# Altium PCB PCI Express x1 - 111.15x167.65mm.pcbdoc
Units mm, origin at the board's own origin, x right, y up, seen from the top; angles counter-clockwise.
Board outline 167.65 x 111.15 mm, 4 copper layers (Top Layer, InternalPlane1, InternalPlane2, Bottom Layer), stack 1.59 mm thick; 1 components, 0 nets, 38 pads, 0 vias.
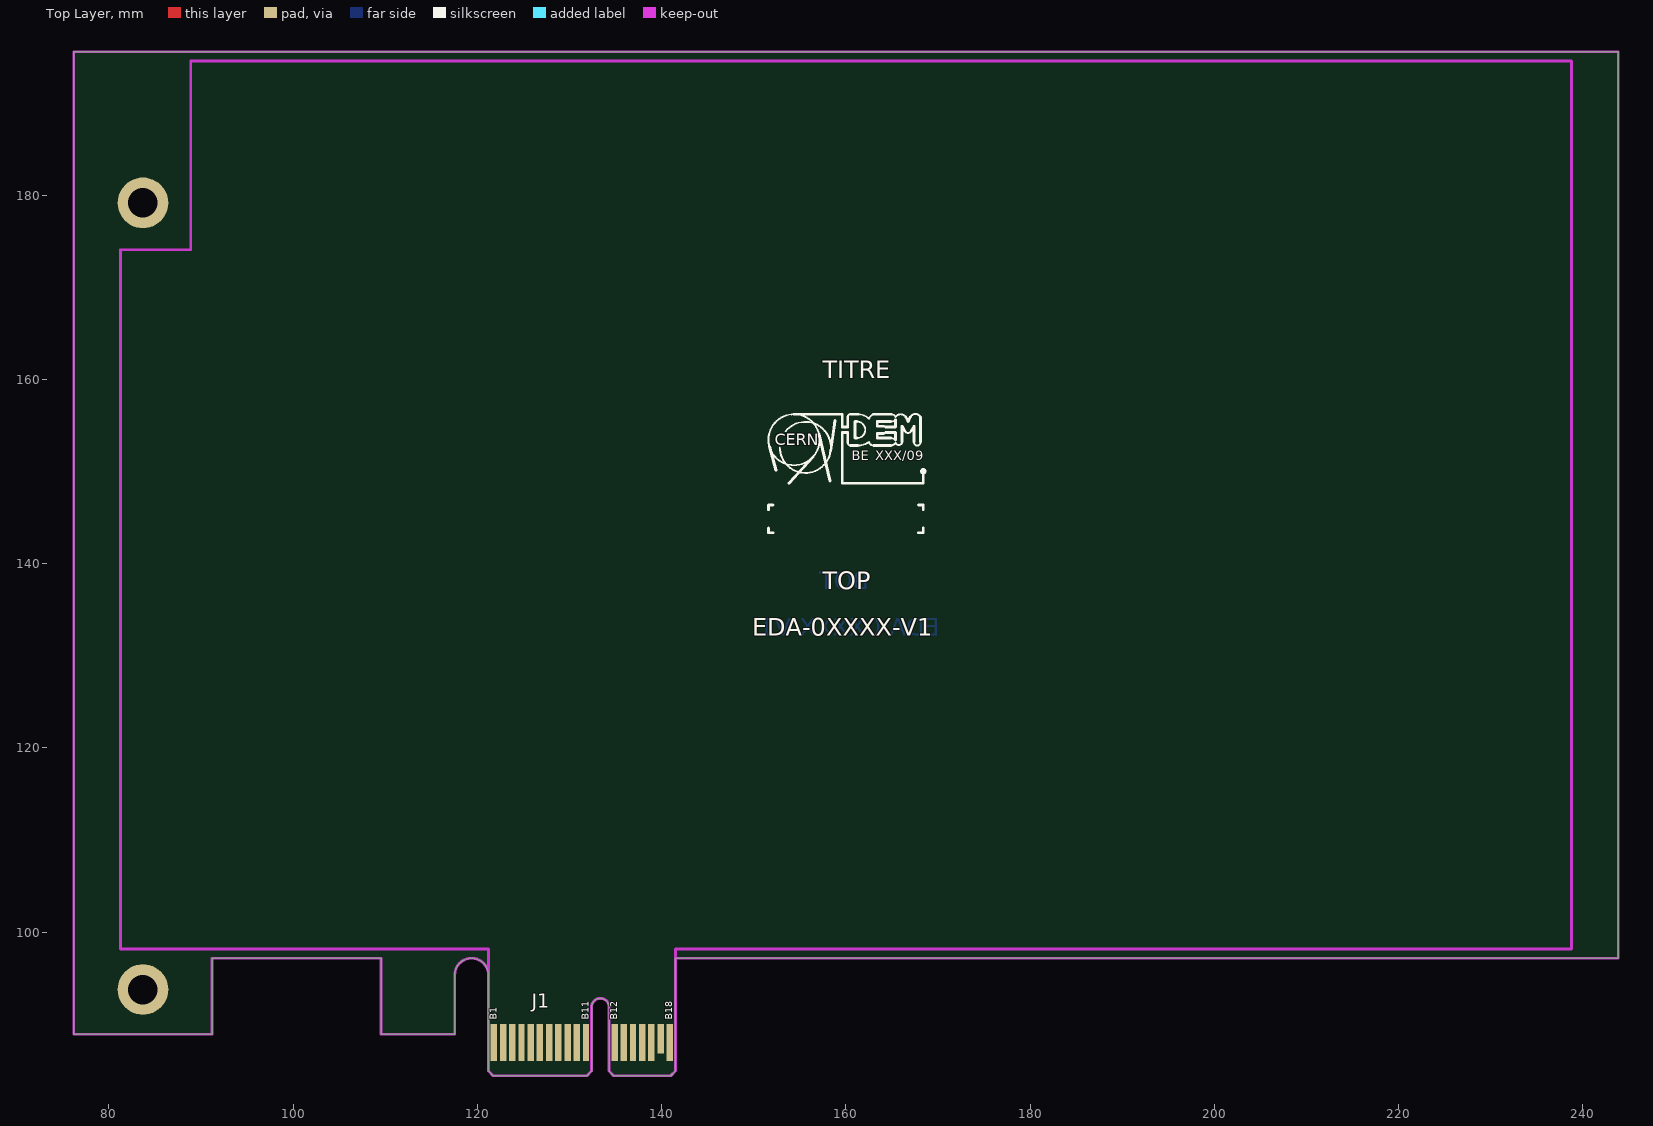
[diagram p0: Top Layer view]
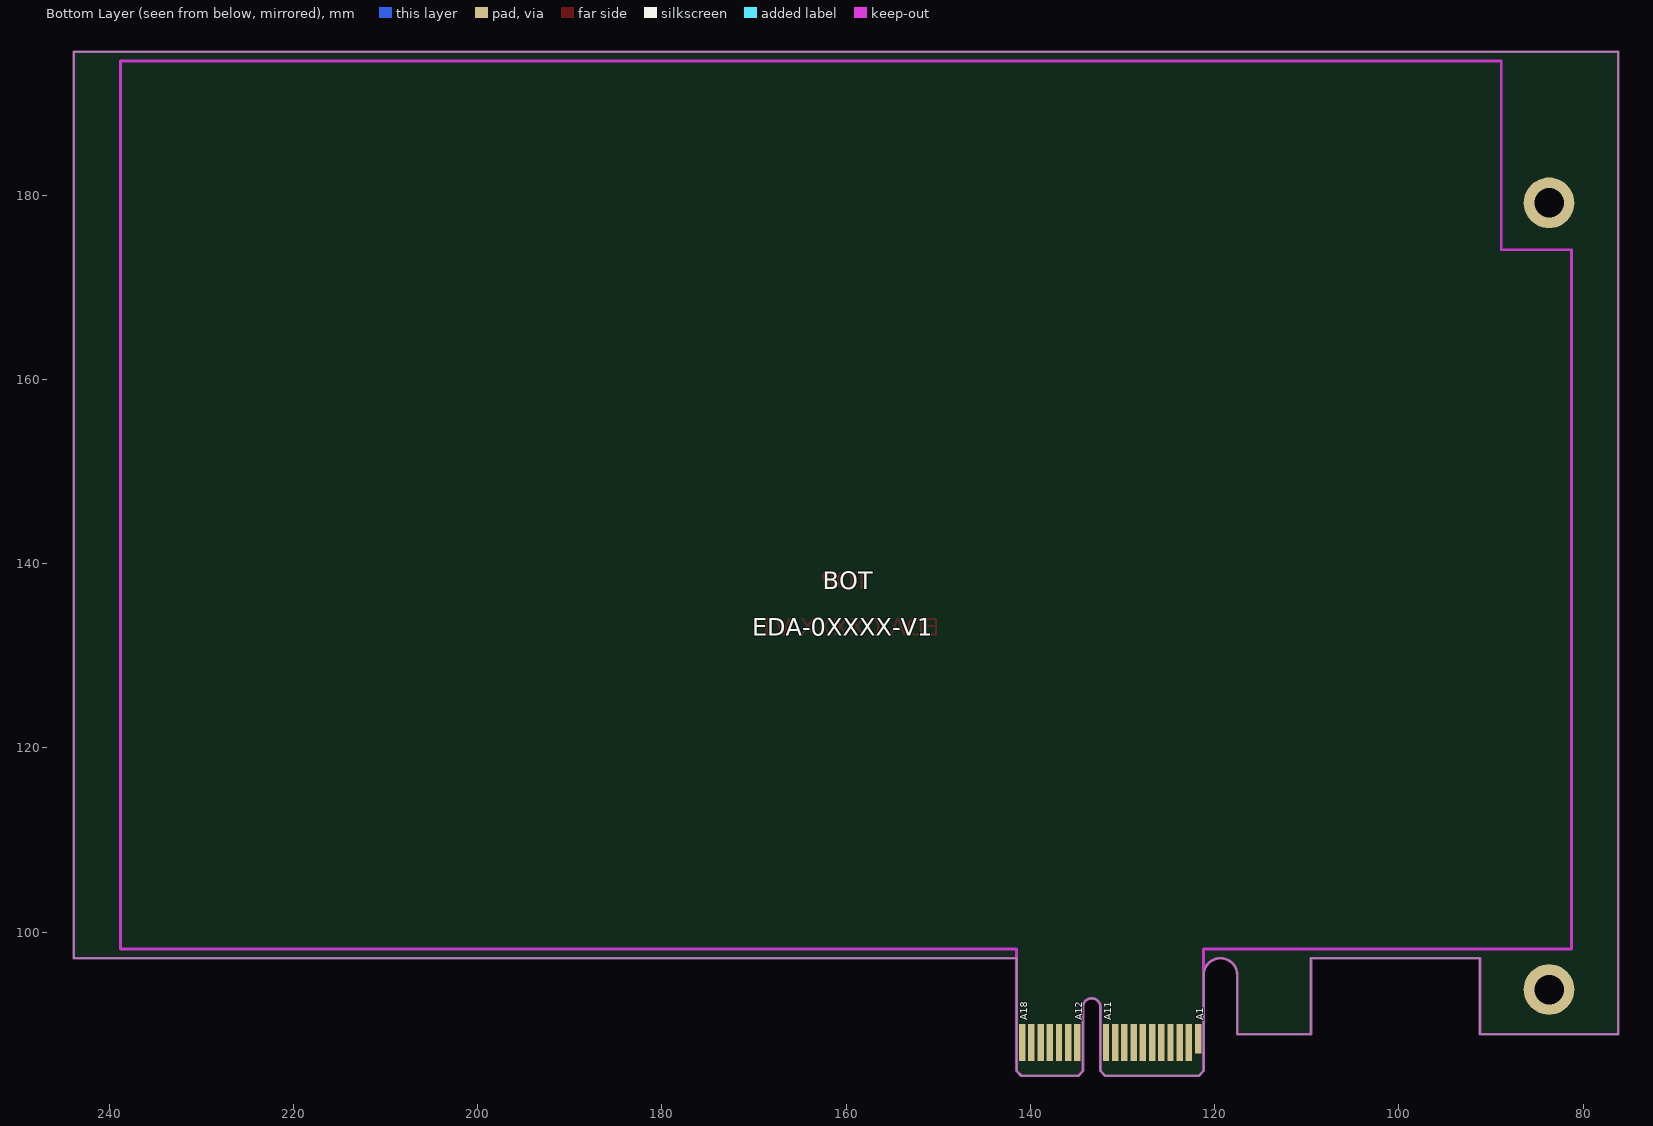
[diagram p1: Bottom Layer view, seen from below]
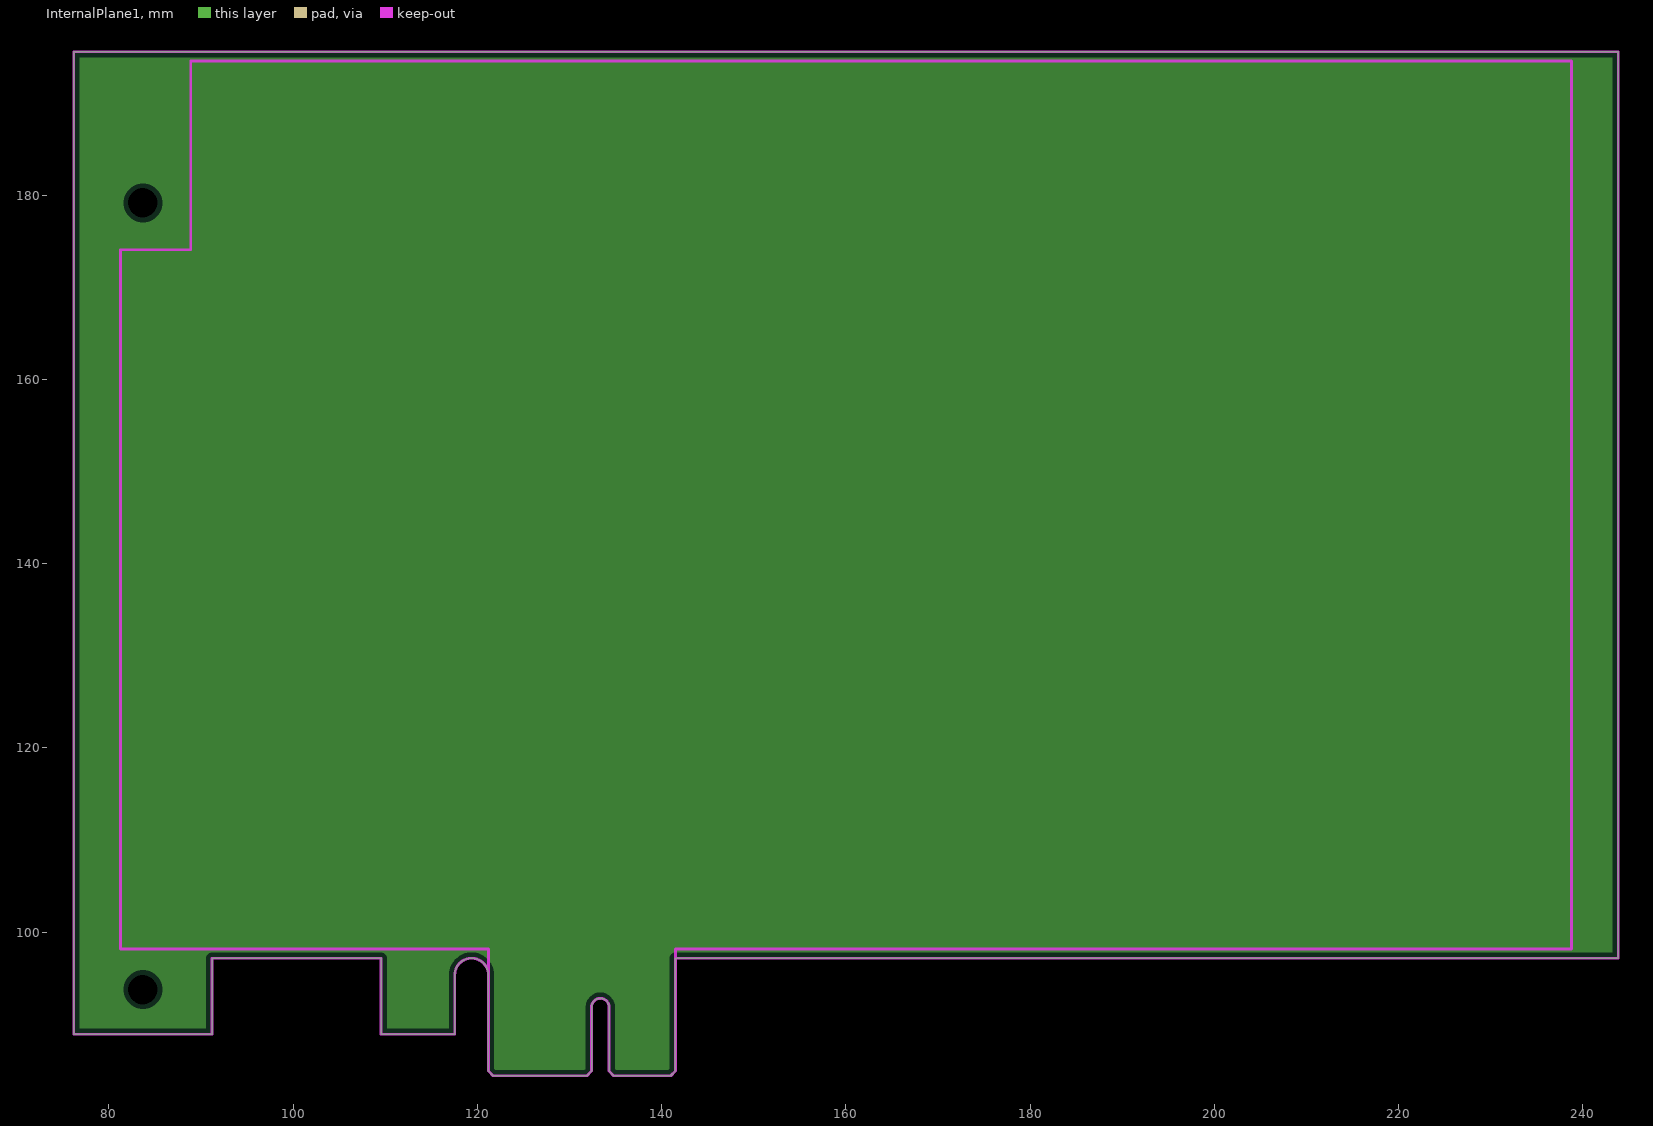
[diagram p2: InternalPlane1, clearances drawn from the general rule]
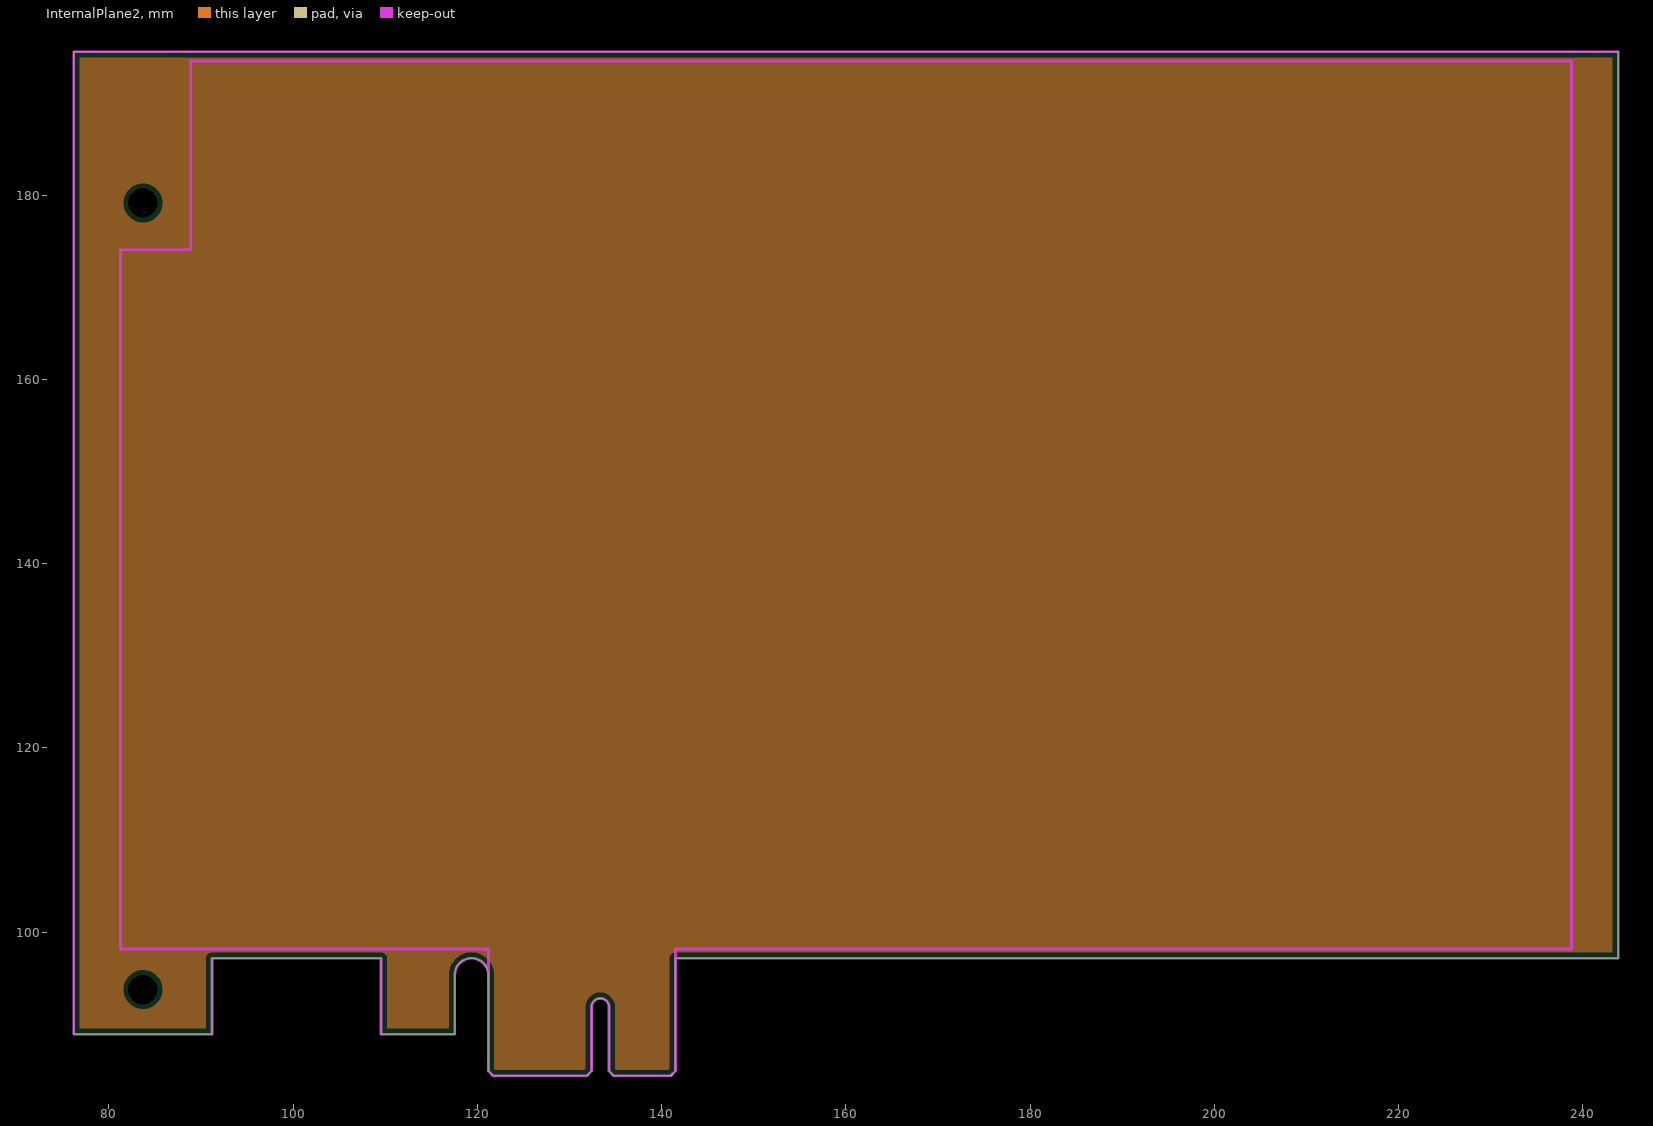
[diagram p3: InternalPlane2, clearances drawn from the general rule]

## Layer stack, top to bottom
Top Layer: signal copper 0.035
Dielectric: prepreg 0.225, FR-4, Dk 4.8
InternalPlane1: plane copper 0.035
Dielectric: core 1, FR-4, Dk 4.8
InternalPlane2: plane copper 0.035
Dielectric: prepreg 0.225, FR-4, Dk 4.8
Bottom Layer: signal copper 0.035

## Board outline
76.2,88.9 91.2,88.9 91.2,97.15 109.55,97.15 109.55,88.9 117.55,88.9 117.55,95.325 cw(c119.375,95.325) 121.2,95.325 121.2,84.9 121.7,84.4 131.9,84.4 132.4,84.9 132.4,91.85 cw(c133.35,91.85) 134.3,91.85 134.3,84.9 134.8,84.4 141,84.4 141.5,84.9 141.5,97.15 243.85,97.15 243.85,195.55 76.2,195.55

## Design rules (kind name [scope] priority, off if disabled: settings)
Clearance [All] p1: gap=0.31
ComponentClearance [All] p1: gap=0 collisioncheckmode=3 verticalgap=0.254 showdistances=FALSE
FabricationTestPointUsage TestPointUsage [All] p1: valid=0 allowmultiple=FALSE
FabricationTestpoint Testpoint [All] p1: side=3 testpointundercomponent=TRUE minsize=1.016 maxsize=2.54 preferedsize=1.524 minholesize=0 maxholesize=1.016 preferedholesize=0.813 testpointgrid=0.025 allowsidetop=TRUE allowsidebottom=TRUE usegrid=TRUE gridtolerance=0
HoleSize [All] p1: absolutevalues=TRUE maxlimit=5 minlimit=0.5 maxpercent=80.000 minpercent=20.000
PermittedLayers [All] p1: toplayerpermitted=TRUE bottomlayerpermitted=FALSE
PlaneClearance [All] p1: clearance=0.508
PlaneConnect [All] p1: planeconnectstyle=Relief reliefexpansion=0.508 reliefentries=4 reliefconductorwidth=0.381 reliefairgap=0.381
PolygonConnect "Vias Direct Connect" [IsVia] p1: connectstyle=Direct reliefconductorwidth=0.254 reliefentries=4 polygonreliefangle="90 Angle"
PolygonConnect [All] p2: connectstyle=Relief reliefconductorwidth=0.635 reliefentries=4 polygonreliefangle="90 Angle"
RoutingVias [All] p1: holewidth=0.5 width=1 viastyle="Through Hole" minholewidth=0.5 minwidth=1 maxholewidth=0.5 maxwidth=1
SilkscreenOverComponentPads [All] p1: minsilkscreentomaskgap=0.254
SolderMaskExpansion [All] p1: expansion=0.127
Width [All] p1: maxlimit=2.54 minlimit=0.305 preferedwidth=0.305
21 further rules are at their usual default settings.

## Components (designator, comment, footprint, x,y, rotation, side; value= is the part's Value field where it differs from the comment)
J1 "PCI Express" "PCI Express x1" 121.2,84.4 r0 top locked

## Footprints (in the part's own frame and the unit in brackets; to place one, negate y for a bottom-side part, rotate by r counter-clockwise, add the part's x,y. Pads: shape width x height; smd on the part's side, far side on the other; paste and mask are expansions set on the pad)
"PCI Express x1" [mm] "36 contacts Board Eddge PCI Express x1 Connector"
  rect 0.7x3.2 smd far side paste-0.4: A1(0.6,4)
  rect 0.7x4 smd far side paste-0.4: A2(1.6,3.6) A3(2.6,3.6) A4(3.6,3.6) A5(4.6,3.6) A6(5.6,3.6) A7(6.6,3.6) A8(7.6,3.6) A9(8.6,3.6) A10(9.6,3.6) A11(10.6,3.6) A12(13.7,3.6) A13(14.7,3.6) A14(15.7,3.6) A15(16.7,3.6) A16(17.7,3.6) A17(18.7,3.6) A18(19.7,3.6)
  rect 0.7x4 smd paste-0.4: B1(0.6,3.6) B2(1.6,3.6) B3(2.6,3.6) B4(3.6,3.6) B5(4.6,3.6) B6(5.6,3.6) B7(6.6,3.6) B8(7.6,3.6) B9(8.6,3.6) B10(9.6,3.6) B11(10.6,3.6) B12(13.7,3.6) B13(14.7,3.6) B14(15.7,3.6) B15(16.7,3.6) B16(17.7,3.6) B18(19.7,3.6)
  rect 0.7x3.2 smd paste-0.4: B17(18.7,4)

## Part data
J1: library part "PCI Express x1", "36 contacts Board Eddge PCI Express x1 Connector"

## Free pads (board coordinates)
  round 5.5 hole 3.2 paste-0.4: 1(83.699,93.756) 2(83.699,179.156)

## Nets (pads, with @x,y where several pads share a name; then routed paths per layer and width w, separated by ;. In a path a pad name is that pad's centre, name@x,y a point inside that pad or via, vN(x,y) a via of type N, cw(c..) or ccw(c..) an arc to the next point about the centre after c; other vN are vias at no path point)
pads on no net: J1.A1 J1.A2 J1.A3 J1.A4 J1.A5 J1.A6 J1.A7 J1.A8 J1.A9 J1.A10 J1.A11 J1.A12 J1.A13 J1.A14 J1.A15 J1.A16 J1.A17 J1.A18 J1.B1 J1.B2 J1.B3 J1.B4 J1.B5 J1.B6 J1.B7 J1.B8 J1.B9 J1.B10 J1.B11 J1.B12 J1.B13 J1.B14 J1.B15 J1.B16 J1.B17 J1.B18

## Polygon pours and split planes (outlines as drawn)
no net on InternalPlane1 (split plane): 243.213,97.787 141.5,97.787 141.4,97.779 141.303,97.756 141.211,97.718 141.126,97.665 141.05,97.601 140.985,97.525 140.932,97.439 140.894,97.347 140.871,97.25 140.863,97.15 140.863,85.164 140.736,85.037 135.064,85.037 134.937,85.164 134.937,91.85 134.928,92.028 134.898,92.203 134.848,92.375 134.78,92.539 134.694,92.695 134.591,92.84 134.472,92.973 134.34,93.091 134.195,93.194 134.039,93.281 133.874,93.349 133.703,93.398 133.528,93.428 133.35,93.438 133.172,93.428 132.997,93.398 132.826,93.349 132.661,93.281 132.505,93.194 132.36,93.091 132.227,92.973 132.109,92.84 132.006,92.695 131.92,92.539 131.851,92.375 131.802,92.203 131.772,92.028 131.762,91.85 131.763,91.85 131.763,85.164 131.636,85.037 121.964,85.037 121.837,85.164 121.837,95.325 121.828,95.54 121.8,95.753 121.753,95.962 121.689,96.167 121.607,96.366 121.507,96.556 121.392,96.738 121.261,96.908 121.116,97.066 120.958,97.211 120.787,97.342 120.606,97.458 120.416,97.557 120.217,97.639 120.012,97.704 119.803,97.75 119.59,97.778 119.375,97.788 119.16,97.778 118.947,97.75 118.738,97.704 118.533,97.639 118.334,97.557 118.144,97.458 117.963,97.342 117.792,97.211 117.634,97.066 117.489,96.908 117.358,96.738 117.242,96.556 117.143,96.366 117.061,96.167 116.997,95.962 116.95,95.753 116.922,95.54 116.913,95.325 116.913,89.537 110.187,89.537 110.187,97.15 110.179,97.25 110.156,97.347 110.118,97.439 110.065,97.525 110,97.601 109.924,97.665 109.839,97.718 109.747,97.756 109.65,97.779 109.55,97.787 91.2,97.787 91.1,97.779 91.003,97.756 90.911,97.718 90.826,97.665 90.75,97.601 90.685,97.525 90.632,97.439 90.594,97.347 90.571,97.25 90.563,97.15 90.563,89.537 76.837,89.537 76.837,194.913 243.213,194.913
no net on InternalPlane2 (split plane): 243.213,97.787 141.5,97.787 141.4,97.779 141.303,97.756 141.211,97.718 141.126,97.665 141.05,97.601 140.985,97.525 140.932,97.439 140.894,97.347 140.871,97.25 140.863,97.15 140.863,85.164 140.736,85.037 135.064,85.037 134.937,85.164 134.937,91.85 134.928,92.028 134.898,92.203 134.848,92.375 134.78,92.539 134.694,92.695 134.591,92.84 134.472,92.973 134.34,93.091 134.195,93.194 134.039,93.281 133.874,93.349 133.703,93.398 133.528,93.428 133.35,93.438 133.172,93.428 132.997,93.398 132.826,93.349 132.661,93.281 132.505,93.194 132.36,93.091 132.227,92.973 132.109,92.84 132.006,92.695 131.92,92.539 131.851,92.375 131.802,92.203 131.772,92.028 131.762,91.85 131.763,91.85 131.763,85.164 131.636,85.037 121.964,85.037 121.837,85.164 121.837,95.325 121.828,95.54 121.8,95.753 121.753,95.962 121.689,96.167 121.607,96.366 121.507,96.556 121.392,96.738 121.261,96.908 121.116,97.066 120.958,97.211 120.787,97.342 120.606,97.458 120.416,97.557 120.217,97.639 120.012,97.704 119.803,97.75 119.59,97.778 119.375,97.788 119.16,97.778 118.947,97.75 118.738,97.704 118.533,97.639 118.334,97.557 118.144,97.458 117.963,97.342 117.792,97.211 117.634,97.066 117.489,96.908 117.358,96.738 117.242,96.556 117.143,96.366 117.061,96.167 116.997,95.962 116.95,95.753 116.922,95.54 116.913,95.325 116.913,89.537 110.187,89.537 110.187,97.15 110.179,97.25 110.156,97.347 110.118,97.439 110.065,97.525 110,97.601 109.924,97.665 109.839,97.718 109.747,97.756 109.65,97.779 109.55,97.787 91.2,97.787 91.1,97.779 91.003,97.756 90.911,97.718 90.826,97.665 90.75,97.601 90.685,97.525 90.632,97.439 90.594,97.347 90.571,97.25 90.563,97.15 90.563,89.537 76.837,89.537 76.837,194.913 243.213,194.913

## Keep-outs
Keep-Out Layer:
  lines w0.305: 141.5,97.15 243.85,97.15 243.85,195.55 76.2,195.55 76.2,88.9 91.2,88.9 91.2,97.15 109.55,97.15 109.55,88.9 117.55,88.9 117.55,95.325 cw(c119.375,95.325) 121.2,95.325 ; 121.2,95.325 121.2,98.15 81.28,98.15 81.28,174.076 88.9,174.076 88.9,194.55 238.77,194.55 238.77,98.15 141.5,98.15 141.5,84.9 ; 121.2,95.325 121.2,84.9 121.7,84.4 131.9,84.4 132.4,84.9 132.4,91.85 cw(c133.35,91.85) 134.3,91.85 134.3,84.9 ; 134.3,84.9 134.8,84.4 ; 134.3,84.9 134.8,84.4 ; 134.8,84.4 141,84.4 ; 141,84.4 141.5,84.9 ; 141,84.4 141.5,84.9

## Other copper
Top Layer:
  text "TOP" at 157.485,137.23 h1.91
  text "EDA-0XXXX-V1" at 149.865,132.15 h1.91
  text ".Layer_Name" at 144.78,66.04 h1.91
  text "1" at 155.575,52.07 h2.54
Bottom Layer:
  text "BOT" at 162.565,137.23 h1.91
  text "EDA-0XXXX-V1" at 170.185,132.15 h1.91
  text ".Layer_Name" at 182.88,66.04 h1.91
  text "4" at 170.815,52.07 h2.54
InternalPlane1 (plane layer: these items are gaps in the copper):
  rectangle: 163.83,50.8 173.99,55.88
  rectangle: 153.67,50.8 158.75,55.88
  text "GND" at 93.98,83.82 h2.54
  text "2" at 160.655,52.07 h2.54
InternalPlane2 (plane layer: these items are gaps in the copper):
  rectangle: 168.91,50.8 173.99,55.88
  rectangle: 153.67,50.8 163.83,55.88
  text "+15V" at 100.33,86.36 h2.54
  text "3" at 165.735,52.07 h2.54

## Silkscreen, mask and mechanical layers (free items; w line width, h text height)
Top Overlay:
  circle w0.203: c154.382,153.44 r2.775
  circle w0.3: c168.412,150.014 r0.2
  lines w0.203: 152.839,152.616 ccw(c155.612,152.606) 153.46,154.355 ; 160.212,153.114 ccw(c160.512,153.114) 160.512,152.814 ; 160.212,155.914 cw(c160.512,155.914) 160.512,156.214 ; 161.212,153.614 ccw(c161.212,154.514) 161.212,155.414 ; 161.312,152.814 ccw(c161.369,154.643) 162.513,153.215 ; 161.312,156.214 cw(c161.312,154.524) 162.511,155.715 cw(c163.345,155.381) 163.012,156.214 ; 162.512,153.214 ccw(c163.012,153.327) 163.012,152.814 ; 164.112,154.114 ccw(c164.146,154.298) 164.312,154.214 ; 164.112,154.914 cw(c164.146,154.731) 164.312,154.815 ; 164.912,152.814 ccw(c164.845,153.494) 165.412,153.114 ; 164.912,155.414 ccw(c164.912,156.139) 165.412,155.614 ; 164.912,156.214 cw(c164.912,155.648) 165.412,155.915 cw(c165.962,155.548) 166.512,155.915 ; 164.913,153.614 cw(c164.893,152.84) 165.413,153.414 ; 165.412,153.114 ccw(c165.754,153.223) 166.112,153.215 ; 166.412,154.414 ccw(c166.762,154.554) 167.112,154.414 ; 167.012,155.914 cw(c167.562,155.608) 168.112,155.914 ; 167.412,153.214 ccw(c167.762,153.164) 168.112,153.214
  lines w0.305: 151.612,143.844 151.612,143.344 152.112,143.344 ; 151.612,145.844 151.612,146.344 152.112,146.344 ; 151.709,152.693 152.428,150.122 ; 153.828,148.714 156.432,151.57 ; 154.382,156.214 159.612,156.214 159.612,154.814 160.212,154.814 160.212,155.914 ; 157.083,154.071 158.277,148.96 ; 158.358,152.214 158.83,155.527 ; 160.212,153.114 160.212,154.214 159.612,154.214 159.612,148.714 168.412,148.714 168.412,150.014 ; 160.512,152.814 161.312,152.814 ; 160.512,156.214 161.312,156.214 ; 161.212,153.614 161.012,153.614 161.012,155.414 161.212,155.414 ; 163.012,152.814 164.912,152.814 ; 163.012,156.214 164.912,156.214 ; 164.112,154.114 163.412,154.114 163.412,153.614 164.912,153.614 ; 164.112,154.914 163.412,154.914 163.412,155.414 164.912,155.414 ; 164.312,154.214 165.412,154.214 165.412,153.414 ; 164.312,154.814 165.412,154.814 165.412,155.614 ; 166.112,153.214 166.112,154.914 166.412,154.414 ; 166.512,155.914 166.762,155.414 167.012,155.914 ; 167.112,154.414 167.412,154.914 167.412,153.214 ; 167.912,143.344 168.412,143.344 168.412,143.844 ; 167.912,146.344 168.412,146.344 168.412,145.844 ; 168.112,153.214 168.112,155.914
  text "TITRE" at 157.485,160.09 h1.91
  text "CERN" at 152.265,152.845 h1.27
  text "BE" at 160.647,151.194 h1.02
  text "XXX/09" at 163.187,151.194 h1.02
  text "TOP" at 157.485,137.23 h1.91
  text "EDA-0XXXX-V1" at 149.865,132.15 h1.91
  text ".Layer_Name" at 144.78,63.5 h1.91
Bottom Overlay:
  text "BOT" at 162.565,137.23 h1.91
  text "EDA-0XXXX-V1" at 170.185,132.15 h1.91
  text ".Layer_Name" at 182.88,63.5 h1.91
Top Paste:
  text ".Layer_Name" at 144.78,58.42 h1.91
Bottom Paste:
  text ".Layer_Name" at 182.88,58.42 h1.91
Top Solder:
  rectangle: 121.2,80 141.5,90
  rectangle: 109.55,88.9 117.55,92.35
  lines w3.175: 66.2,195 66.2,81.5 141.1,81.5
  lines w5.715: 66.2,195 66.2,207.55
  text ".Layer_Name" at 144.78,60.96 h1.91
Bottom Solder:
  rectangle: 121.2,80 141.5,90
  rectangle: 109.55,88.9 117.55,92.35
  lines w3.175: 66.2,195 66.2,81.5 141.1,81.5
  lines w5.715: 66.2,195 66.2,207.55
  text ".Layer_Name" at 182.88,60.96 h1.91
Mechanical 1:
  the board outline again, w0.305
Mechanical 3:
  circle w0.1: c83.699,179.156 r1.6
  circle w0.1: c83.699,93.756 r1.6
  lines w0.305: 75.16,89.77 86.87,89.77 86.87,97.72 75.16,97.72 ; 75.16,175.17 86.87,175.17 86.87,183.12 75.16,183.12 ; 28.008,189.26 28.008,190.12 47.058,190.12 47.058,189.26 ; 28.008,189.26 47.058,189.26 ; 28.008,189.26 28.008,186.34 29.648,184.7 31.178,184.7 31.178,80.62 35.288,76.51 35.288,69.24 45.478,69.24 45.478,76.51 49.598,80.62 49.598,182.78 47.058,185.32 47.058,189.26 ; 28.008,189.26 47.058,189.26 ; 75.16,189.26 75.16,190.12 63.74,190.12 63.74,189.26 75.16,189.26 ; 75.16,189.26 74.3,189.26 74.3,69.24 75.16,69.24 75.16,189.26 ; 31.178,89.77 31.178,97.72 32.028,97.72 32.028,89.77 31.178,89.77 ; 31.178,175.17 31.178,183.12 32.028,183.12 32.028,175.17 31.178,175.17 ; 32.028,88.895 32.028,195.545 33.598,195.545 33.598,88.895 32.028,88.895
Corners:
  lines w0.305: 71.2,88.9 76.2,88.9 76.2,83.9 ; 71.2,195.55 76.2,195.55 76.2,200.55 ; 91.2,83.9 91.2,88.9 96.2,88.9 ; 104.55,88.9 109.55,88.9 109.55,83.9 ; 116.2,84.4 121.2,84.4 121.2,79.4 ; 141.5,79.4 141.5,84.4 146.5,84.4 ; 158.75,50.8 158.75,55.88 ; 163.83,50.8 163.83,55.88 ; 168.91,50.8 168.91,55.88 ; 243.85,92.15 243.85,97.15 248.85,97.15 ; 243.85,200.55 243.85,195.55 248.85,195.55 ; 153.67,50.8 173.99,50.8 173.99,55.88 153.67,55.88 153.67,50.8
Title Block:
  circle w0.305: c88.265,63.5 r3.81
  lines w0.254: 86.36,62.238 ccw(c90.805,62.23) 87.073,64.644
  lines w0.305: 84.709,62.128 85.725,59.055 ; 87.757,56.007 90.83,60.681 ; 88.265,67.31 95.885,67.945 ; 91.999,64.262 94.615,55.88 ; 95.25,62.23 95.25,66.675 ; 97.79,59.055 139.7,59.055 ; 97.79,62.23 139.7,62.23 ; 97.79,65.405 139.7,65.405 ; 111.76,55.88 111.76,68.58 ; 83.82,55.88 96.52,55.88 96.52,68.58 83.82,68.58 83.82,55.88 ; 97.79,55.88 139.7,55.88 139.7,68.58 97.79,68.58 97.79,55.88
  text "Number" at 99.06,66.04 h1.91
  text "EDA-0XXXX-V1" at 113.03,66.04 h1.91
  text "Drawn By" at 99.06,62.865 h1.91
  text "CEGELEC XXX" at 113.03,62.865 h1.91
  text "CERN" at 85.09,62.611 h2.54
  text "DATE" at 99.06,59.69 h1.91
  text "XX-XX-XXXX" at 113.03,59.69 h1.91
  text "MOD." at 99.06,56.515 h1.91
  text "-" at 113.03,56.515 h1.91
  text "Print Date" at 99.06,53.34 h1.27
  text ".Print_Date" at 114.3,53.34 h1.27
  text ".Print_Time" at 127,53.34 h1.27
  text ".Print_Scale" at 99.06,50.8 h1.27
Notvisible:
  lines w0.1: 75.946,88.9 76.454,88.9 ; 76.2,88.646 76.2,89.154 ; 109.55,92.35 117.55,92.35 ; 132.4,79.4 132.4,84.4 134.3,84.4 134.3,79.4 ; 133.35,84.4 133.35,91.85
  lines w0.305: 81.28,144.85 160.025,144.85 ; 82.699,93.756 83.699,93.756 ; 82.699,179.156 83.699,179.156 ; 83.699,92.756 83.699,93.756 ; 83.699,94.756 83.699,93.756 ; 83.699,178.156 83.699,179.156 ; 83.699,180.156 83.699,179.156 ; 84.699,93.756 83.699,93.756 ; 84.699,179.156 83.699,179.156 ; 160.025,98.15 160.025,144.85 ; 160.025,194.55 160.025,144.85 ; 238.77,144.85 160.025,144.85
  text "76.2,88.9 (mm)" at 76.454,88.9 h1.5
Plating Frame:
  lines w0.305: 121.8,81.5 121.8,88 ; 122.8,81.5 122.8,88 ; 123.8,81.5 123.8,88 ; 124.8,81.5 124.8,88 ; 125.8,81.5 125.8,88 ; 126.8,81.5 126.8,88 ; 127.8,81.5 127.8,88 ; 128.8,81.5 128.8,88 ; 129.8,81.5 129.8,88 ; 130.8,81.5 130.8,88 ; 131.8,81.5 131.8,88 ; 134.9,81.5 134.9,88 ; 135.9,81.5 135.9,88 ; 136.9,81.5 136.9,88 ; 137.9,81.5 137.9,88 ; 138.9,81.5 138.9,88 ; 139.9,81.5 139.9,88 ; 140.9,81.5 140.9,88
  lines w2.54: 66.2,81.5 66.2,195.55 ; 66.3,81.5 141,81.5
  lines w5.08: 66.2,195.55 66.2,207.55
Mechanical 14:
  lines w0.305: 121.2,90 121.2,84.9 121.7,84.4 131.9,84.4 132.4,84.9 132.4,90 ; 134.3,90 134.3,84.9 134.8,84.4 141,84.4 141.5,84.9 141.5,90
Mechanical 15:
  lines w0.305: 121.2,90 132.4,90 ; 134.3,90 141.5,90
Drill Drawing:
  lines w0.1: 118.875,95.325 119.375,95.325 ; 119.375,94.825 119.375,95.325 ; 119.375,95.825 119.375,95.325 ; 119.875,95.325 119.375,95.325 ; 132.85,91.85 133.35,91.85 ; 133.35,91.35 133.35,91.85 ; 133.35,92.35 133.35,91.85 ; 133.85,91.85 133.35,91.85 ; 254.852,105.063 cw(c255.352,86.863) 263.104,103.337
  lines w0.305: 253.277,92.652 254.852,92.652 ; 255.352,86.863 264.516,106.337 ; 262.654,80.397 263.904,80.397 ; 262.654,80.397 263.279,84.397 ; 262.654,80.397 263.904,80.397 ; 262.654,80.397 263.279,84.397 ; 262.654,89.8 263.904,89.8 ; 262.654,89.8 263.279,85.8 ; 262.654,89.8 263.904,89.8 ; 262.654,89.8 263.279,85.8 ; 263.279,84.397 263.279,83.254 263.279,84.397 ; 263.279,84.397 263.904,80.397 ; 263.279,84.397 263.904,80.397 ; 263.279,85.8 263.279,87.254 263.279,85.8 ; 263.279,85.8 263.904,89.8 ; 263.279,85.8 263.904,89.8 ; 253.277,85.8 253.936,84.4 254.193,84.4 254.852,85.8 254.852,195.55 253.277,195.55 253.277,85.8 ; 256.692,84.397 265.779,84.397 256.692,84.397 ; 257.352,85.8 265.779,85.8 257.352,85.8
  text ".LEGEND" at 104,205.2 h2
  text "TYP. 20" at 256.301,107.074 h2.03
  text "- Tolerance unless otherwise noted +-0.13" at 150.74,91.54 h1.91
  text "- All dimension are in mm" at 150.678,88.678 h1.91
  text "1.4" at 266.664,84.395 h1.6
  text "Components" at 205.74,66.04 h1.91
  text ".Component_Count" at 223.52,66.04 h1.91
  text "Pins" at 205.74,63.5 h1.91
  text ".Pad_Count" at 223.52,63.5 h1.91
  text "Vias" at 205.74,60.96 h1.91
  text ".Via_Count" at 223.52,60.96 h1.91
  text "Holes" at 205.74,58.42 h1.91
  text ".Hole_Count" at 223.52,58.42 h1.91
  text "Nets" at 205.74,55.88 h1.91
  text ".Net_Count" at 223.52,55.88 h1.91

## Dimensions
76.2,195.55 to 243.85,195.55 on Drill Drawing
253.277,195.55 to 254.852,195.55 on Drill Drawing
76.2,88.9 to 83.699,179.156 on Drill Drawing
121.7,84.4 to 76.2,88.9 on Drill Drawing
141.5,84.9 to 144,82.5 on Drill Drawing

## Text inside footprints (layer, text, board x,y; h text height)
J1: Top Overlay "B18" at 141.189,90.496 h0.76 r90; Top Overlay "B12" at 135.189,90.496 h0.76 r90; Top Overlay "B11" at 132.089,90.496 h0.76 r90; Top Overlay "B1" at 122.089,90.496 h0.76 r90; Bottom Overlay "A18" at 140.351,90.42 h0.76 r270; Bottom Overlay "A12" at 134.351,90.42 h0.76 r270; Bottom Overlay "A11" at 131.251,90.42 h0.76 r270; Bottom Overlay "A1" at 121.251,90.42 h0.76 r270